# Altium PCB PCB1.PcbDoc (part 2 of 3)
Units mil, origin at the board's own origin, x right, y up, seen from the top; angles counter-clockwise.
Board outline 3550 x 3015 mil, 5 copper layers (Top Layer, GND, Layer 1, Layer 2, Bottom Layer), stack 19.334 mil thick; 291 components, 192 nets, 917 pads, 203 vias.
Unrouted connection lines stored in the file: 51.
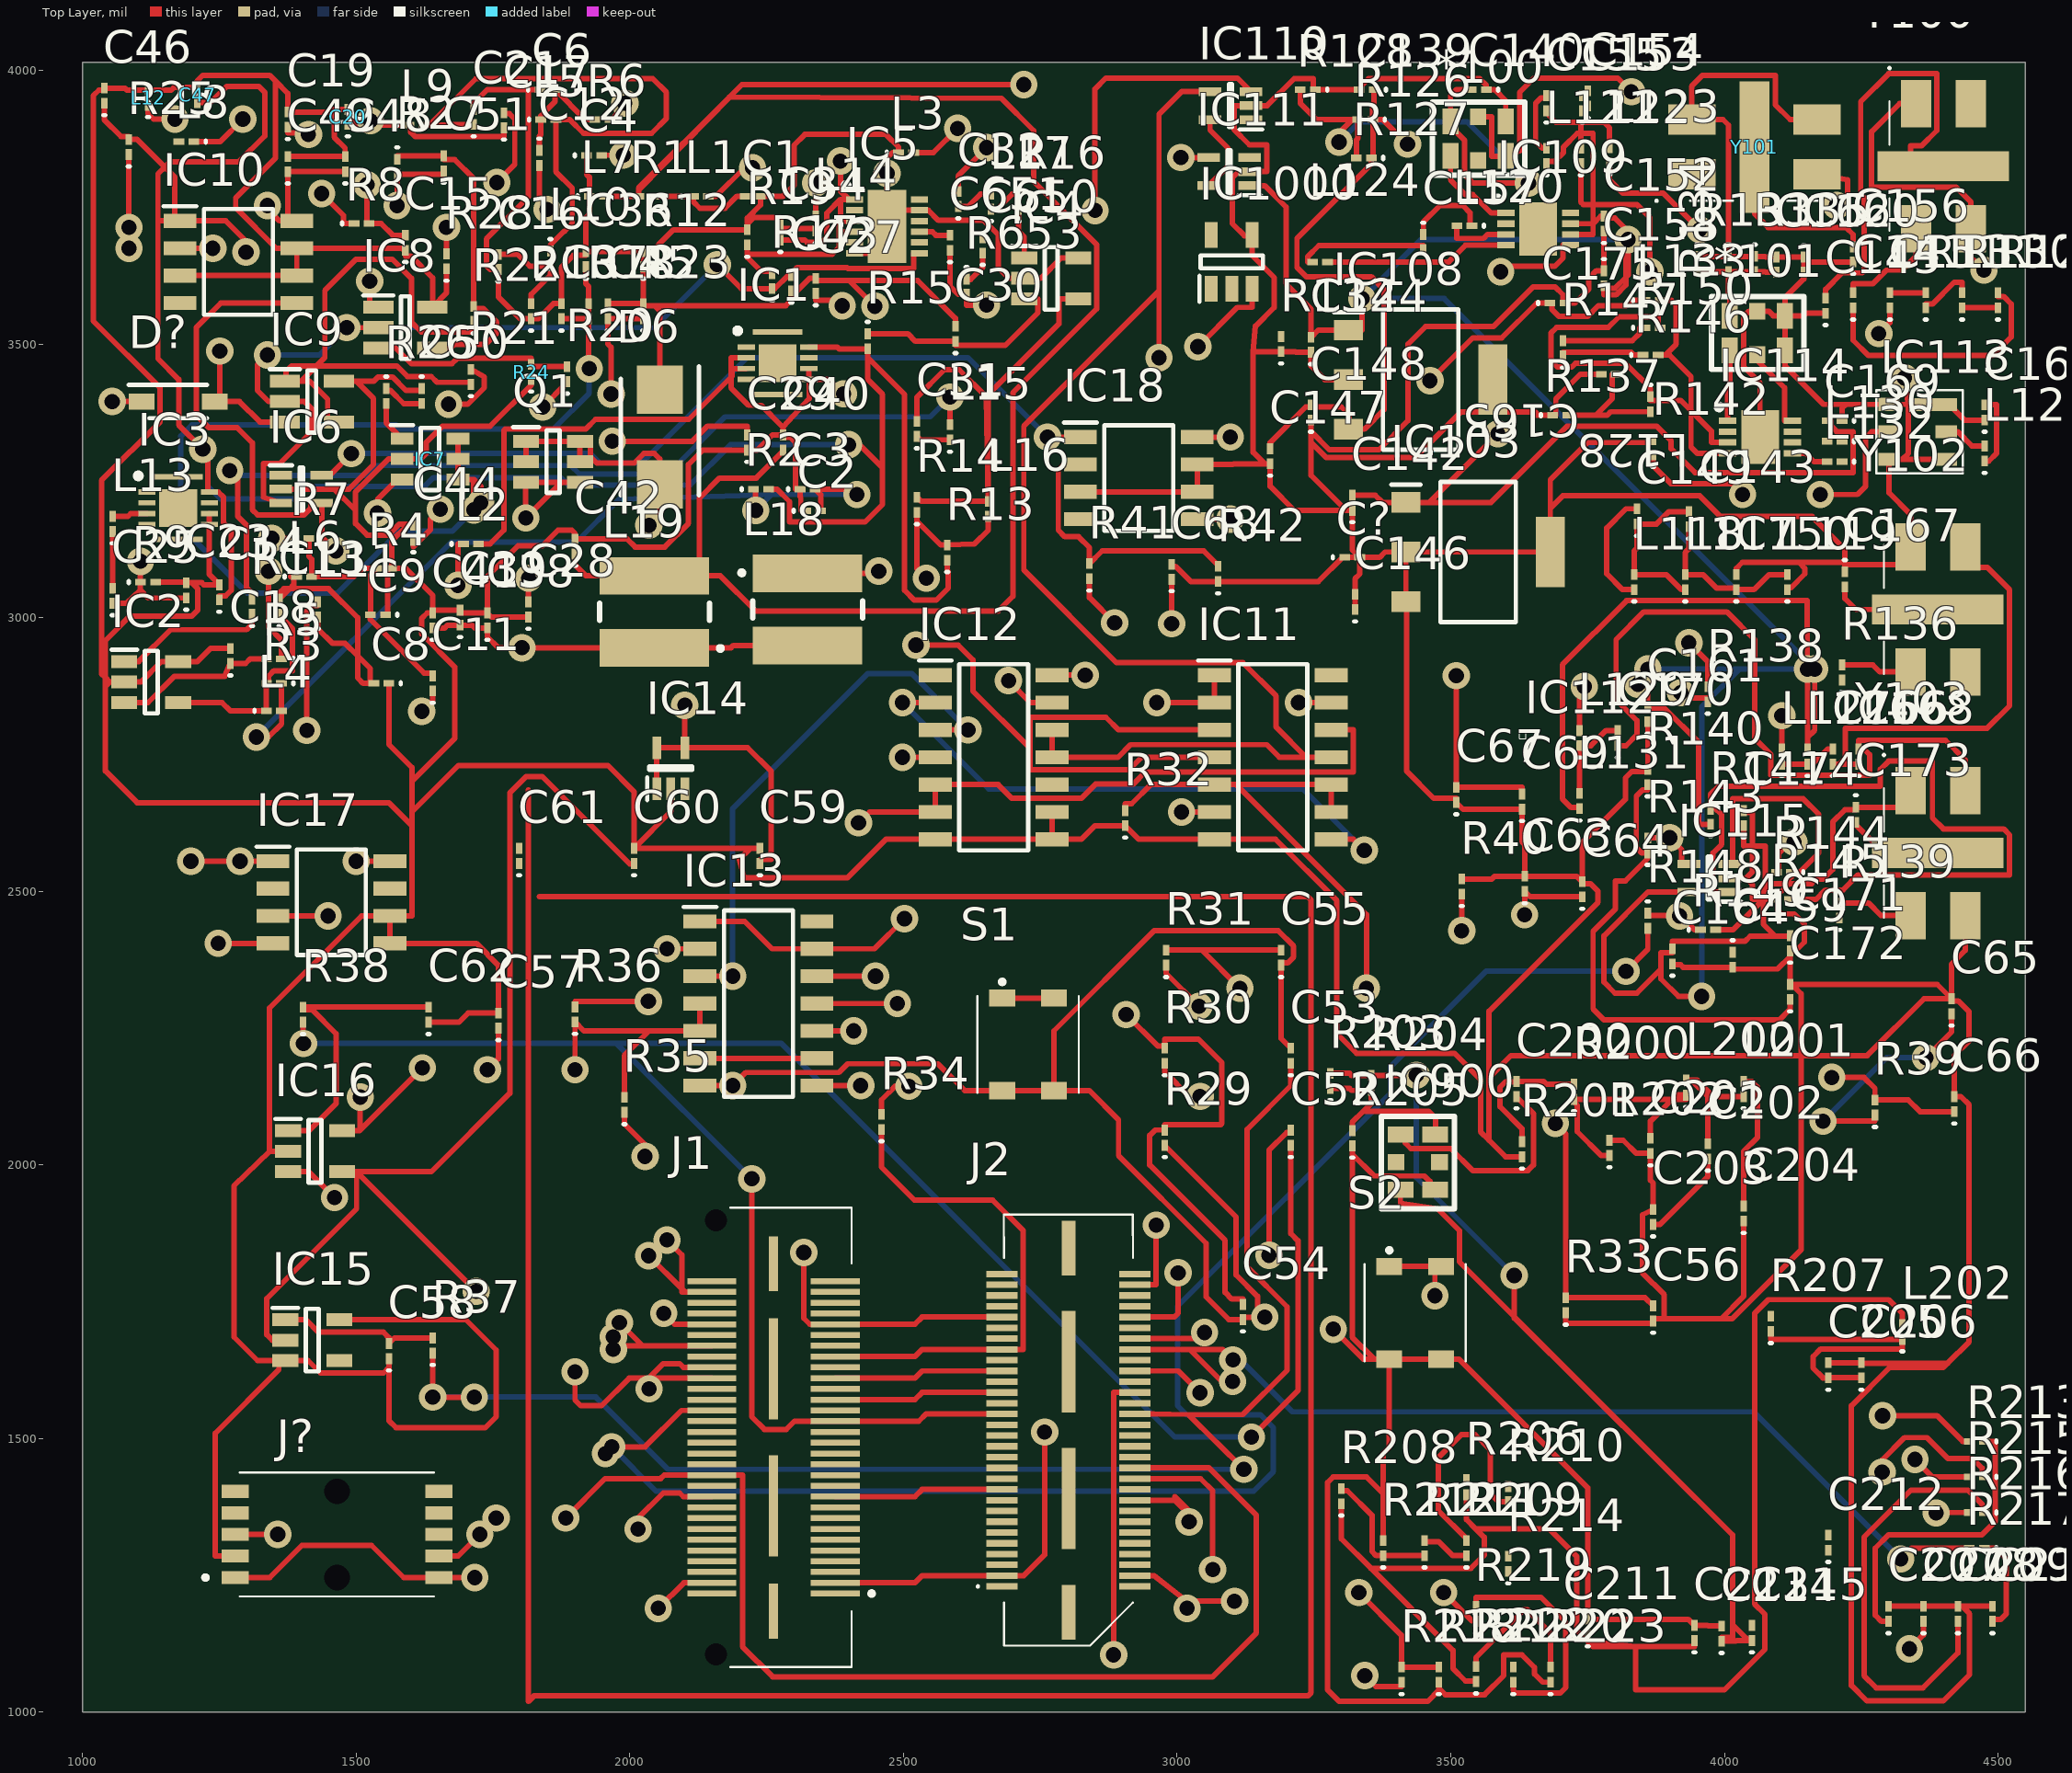
[diagram p0: Top Layer view]

## Via types
v1: diameter 50, hole 28, Top Layer to Bottom Layer, 203 vias

## Nets (pads, with @x,y where several pads share a name; then routed paths per layer and width w, separated by ;. In a path a pad name is that pad's centre, name@x,y a point inside that pad or via, vN(x,y) a via of type N, cw(c..) or ccw(c..) an arc to the next point about the centre after c; other vN are vias at no path point) (continued)
2.5V_2: (continued)
  Top Layer w10: R9.2@1133.78,3065 1186.62,3065 1186.62,3063.78 C23.2@1190,3063.78 1200,3063.78 ; IC10.3@1178.23,3625 IC10.6@1391.77,3625 IC10.7@1391.77,3675 ; IC3.10@1232.09,3190.16 IC3.9@1232.09,3170.47 1232.09,3078.91 1250,3061 C14.2@1250,3060 1221.78,3060 1218,3063.78 1200,3063.78 ; C18.2@1270,2943.78 1233.98,2943.78 1210,2919.8 IC2.5@1175,2919.8 1144.4,2919.8 1107,2882.4 IC2.2@1076.57,2882.4 1050,2882.4 ; J?.3@1278.78,1285.63 1243,1285.63 1243,1510 1359,1626 IC15.3@1359,1642.6 ; IC6.2@1362.6,3235 1460,3235 ; C49.2@1375,3842.56 C48.2@1480,3842.56 1480,3858 1460,3878 1460,3918.94 1454.21,3924.72 ; IC16.2@1375.79,2025 1342,2025 ; IC9.5@1468.43,3432.4 1500,3432.4 ; IC15.5@1469.21,1717.4 1700.6,1717.4 1756,1662 1756,1540 1736,1520 1573,1520 1560,1533 1560,1630 ; C20.2@1485,3928.78 1485,3928.94 1458.42,3928.94 1454.21,3924.72 ; C9.1@1553.78,3005 1558,3005 1558,3090 R4.2@1565,3090 ; C58.1@1560,1646.22 1560,1630 ; C8.1@1560,2880 1560,2768.38 1602,2726.38 1602,2701 ; C44.2@1605,3168.78 C44.2@1605,3169 ; C50.1@1620,3418.78 1620,3415 1591.29,3415 1566.29,3440 1540.26,3440 1532.66,3432.4 1500,3432.4 ; C62.1@1632.76,2260.87 1688,2260.87 1704.69,2277.56 C57.2@1760,2277.56 1760,2365 1720,2405 IC17.5@1561.77,2405 IC17.6@1561.77,2455 ; R28.1@1665,3637.44 1665,3593.19 IC8.5@1640,3568.19 ; C21.2@1715,3928.78 1715,3940 1740,3965 1815,3965 ; C28.1@1815,3001.22 1747.56,3001.22 C38.2@1740,3008.78 ; R24.1@1820,3435 1820,3425 1745,3350 1658,3350 1628,3320 1628,3300 1618,3290 IC7.2@1583.82,3290 1559,3290 1499,3230 1499,3196 ; C6.1@1836.22,3965 1815,3965 ; R36.2@1900,2288.78 1900,2299 v1(2034,2299) ; C42.2@1900,3143.78 C42.2@1900,3144 ; C4.1@1921.22,3845 1921.22,3810 1926.22,3805 L7.1@1926.22,3770 1926.22,3737.22 1920,3731 C36.2@1920,3668.78 ; C45.2@1960,3573.78 R23.2@2025,3573.78 ; D6.1@2055,3416.61 2055,3560 2045,3570 ; IC14.2@2075,2687.6 2075,2645.67 C60.2@2007.76,2578.43 ; IC13.7@2128.23,2145 v1(2188,2145) 2212,2169 2382,2169 2398,2185 2563,2185 2612.29,2135.71 S1.3@2680.51,2135.71 S1.4@2775,2135.71 ; IC1.2@2212.91,3474.84 2185,3474.84 2185,3420 2217,3388 2240,3388 2280,3348 ; C59.2@2237.76,2578.43 2220,2578.43 ; C2.1@2321.22,3195 2312.5,3195 2312.5,3220 2311.22,3221.28 C3.1@2311.22,3235 2303,3235 2303,3320 2293,3330 2280,3330 C40.2@2280,3333.78 ; IC1.10@2327.09,3455.16 IC1.9@2327.09,3435.47 IC1.9@2328,3435.47 ; L14.1@2340,3706.22 2340,3711 2275,3711 C34.2@2275,3717.56 2275,3731 2226,3731 2215,3720 ; v1(2390.47,3409) 2364,3435.47 IC1.9@2328,3435.47 ; IC5.6@2410.94,3665.79 2470,3665.79 IC5.13@2470,3715 IC5.13@2470,3744.53 ; v1(2448,3569) 2401,3616 ; L3.1@2491.22,3850 L3.1@2491,3850 ; C30.2@2595,3532.56 2595,3547 2526,3616 2401,3616 ; IC12.9@2771.77,2645 IC12.8@2771.77,2595 ; IC4.5@2819.21,3657.4 2788.4,3657.4 2751,3620 IC4.2@2720.79,3620 2693,3620 2673,3640 2673,3700 2647,3726 2564,3726 2545.47,3744.53 IC5.11@2529.06,3744.53 IC5.13@2470,3744.53 ; IC18.3@2823.23,3230 IC18.6@3036.77,3230 IC18.7@3036.77,3280 3102,3280 3103.22,3281.22 3160,3281.22 ; R29.1@2977.76,2035.87 2977.76,2035 3107.76,1905 3107.76,1799.24 3147,1760 3147,1735 v1(3160,1722) 3120,1722 C54.1@3120,1717.44 3094.56,1717.44 3053,1759 3053,1857 2893,2017 2893,2082.71 2840,2135.71 S1.4@2775,2135.71 ; C68.2@2990,3097.56 2990,3094 2997,3094 3025,3066 R42.1@3075,3066 ; R42.1@3075,3066.22 R42.1@3075,3066 ; IC1000.4@3137.4,3699.21 IC1000.4@3137.4,3697.85 ; v1(3168,1835) 3168,2027 3200,2059 3207.76,2059 C52.2@3207.76,2063.43 ; C53.2@3207.76,2213.43 3190,2231.18 C55.1@3190,2365 3190,2369 3202,2369 3213,2380 3213,2400 3185,2428 2958,2428 2775,2245 S1.4@2775,2135.71 ; C148.1@3245,3361.22 3245,3340 ; v1(3285.35,1700) 3340,1645.35 3360,1645.35 ; IC108.2@3313.11,3435 3270,3435 3245,3460 C144.1@3245,3485 3217.22,3485 3216,3486.22 R132.1@3190,3486.22 3190,3486 3139,3486 ; R205.1@3320,2035 3320,2020 ; C142.1@3320,3196.22 C142.1@3320,3196 ; C146.1@3325,3015 C146.2@3325,3042.56 3325,3071 3333.78,3079.78 C?.2@3333.78,3110 ; R212.2@3376.25,1313.78 3376.25,1400 ; IC900.3@3471.28,1954.56 3462,1954.56 3462,1970 3452,1980 3360,1980 3320,2020 ; R221.1@3478,1055 3478,1044.28 ; R40.2@3520,2522.56 3575,2522.56 3580,2527.56 C63.2@3635,2527.56 ; IC108.4@3576.89,3435 3576.89,3376.02 3647.98,3376.02 ; *100.3@3600.44,3906.73 3600.44,3944.56 3580,3965 C140.1@3565,3965 3565,3973 3553,3985 3350,3985 3336,3971 3336,3965 C139.2@3332.44,3965 R128.1@3252.56,3965 3249,3965 3249,3985 3214,3985 3164.59,3935.59 IC110.2@3135,3935.59 3104,3935.59 3104,3892 3132,3864 3164,3864 3164,3815 IC111.2@3132.4,3815 3112,3815 3101,3804 3101,3720 3123.15,3697.85 IC1000.4@3137.4,3697.85 ; R201.1@3630,2015 3600,2015 3570,2045 ; R223.1@3682,1055 3668,1055 3653,1070 3653,1082 3630.31,1104.69 3597.01,1104.69 3597.01,1067.31 3561.98,1032.28 3490,1032.28 3478,1044.28 ; R33.1@3710,1730 3710,1711 3870,1711 C56.1@3870,1715 3870,1719 3890,1719 ; C165.1@3775,3445 3737,3445 3692,3400 3692,3370 R137.1@3686.22,3370 3660,3370 ; C158.1@3780,3633.78 C158.1@3780,3634 ; C152.1@3780,3706.22 C158.1@3780,3634 ; R202.2@3790,2045 3815,2045 3838.78,2021.22 C201.1@3865,2021.22 3865,1972 3870,1967 C203.2@3870,1918.78 3850,1909 3850,1803 3890,1763 3890,1719 ; C161.1@3860,2810 R140.2@3860,2722.56 3860,2719 3831,2719 3819,2707 3819,2668 3740,2589 C64.2@3740,2517.56 ; R142.2@3870,3325 3870,3320 3750,3320 3681.89,3251.89 3681.89,3200 ; C164.1@3905,2367.44 3905,2365.82 3920,2365.82 3924.6,2361.22 C159.2@4015,2361.22 4015,2358 4097,2358 4120,2381 ; R133.1@3950,3660 R134.1@4007.5,3660 ; C214.2@3995,1157.56 3970.22,1157.56 3969,1158.78 C213.2@3945,1158.78 3933.78,1170 C211.2@3750,1170 3750,1410.35 3515,1645.35 S2.4@3482.24,1645.35 S2.3@3387.76,1645.35 ; IC115.2@4010,2524.41 4040,2524.41 ; C150.2@4021.67,3078.78 4021.67,3090 4032.67,3101 4136,3101 ; C204.1@4035,1897.44 4035,1760 3994,1719 ; C174.2@4035,2647.56 4035,2644 4051,2644 4051,2535.41 4040,2524.41 ; IC114.9@4065,3330 4065,3429 4035,3459 4035,3550 4045,3560 *101.2@4060,3560 4081,3560 4089.27,3551.73 *101.3@4110.44,3551.73 ; L119.1@4115,3051.22 4115,3055 4122,3055 4147,3080 4147,3090 4136,3101 ; Y101.4@4169.17,3910.04 4120,3910.04 4093,3937.04 4093,3991 3960,3991 3940,3971 3940,3910.04 Y101.6@3940.83,3910.04 3997.46,3910.04 4007.5,3900 R134.1@4007.5,3660 ; C145.1@4185,3556.22 4149.49,3556.22 4145,3551.73 *101.3@4110.44,3551.73 ; C205.2@4190,1638.78 C206.2@4250,1638.78 4250,1638 4408,1638 ; C169.1@4215,3360 4215,3382.67 4222,3389.67 ; C167.1@4220,3083.78 4220,3097 ; C156.1@4235,3650 4153.78,3650 C160.1@4149.39,3654.39 ; C173.1@4240,2653.78 C173.1@4240,2653 ; C207.2@4300,1193.78 C208.2@4363.33,1193.78 C209.2@4426.67,1193.78 4434.22,1193.78 ; v1(4329,3438) 4336,3389.67 ; Y103.1@4339.96,2684.17 4339.96,2653 C173.1@4240,2653 ; Y100.1@4350,3939.17 4320,3939.17 4269,3888.17 4269,3787 4423,3787 4450,3760 Y100.4@4450,3710.83 4450,3659 v1(4474,3635) ; IC113.3@4405,3289.66 4325.66,3289.66 ; Y103.4@4439.96,2455.83 4439.96,2391.96 4415,2367 C65.2@4415,2303.78 ; C163.1@4475,3361.22 4475,3361 4438.64,3361 4410,3389.64 IC113.1@4385.31,3389.64 4336,3389.64 ; C210.2@4490,1193.78 4434.22,1193.78 ; 1042,2874.4 1042,2890.4 ; 1042,2874.4 1042,2720 1100,2662 1560,2662 1602,2620 ; 1042,2874.4 1050,2882.4 ; 1042,2890.4 1042,2958.38 1086.62,3003 1200,3003 1211,3014 1211,3052.78 1200,3063.78 ; 1042,2890.4 1050,2882.4 ; 1042,2890.4 1035,2897.4 1035,3251 1142,3358 1142,3420 1020,3542 1020,3954 1030,3964 1040,3964 C46.2@1040,3967.56 1078,3967.56 1081.78,3963.78 L12.2@1120,3963.78 1162,3963.78 1167,3968.78 C47.2@1210,3968.78 1210,3981 1220,3991 1342,3991 1353,3980 ; 1342,2025 1277,1962 1277,1685.6 1320,1642.6 IC15.3@1359,1642.6 ; 1342,2025 1342,2287 1510,2455 IC17.6@1561.77,2455 ; 1353,3980 1375,3958 C19.2@1375,3923.78 1453.27,3923.78 1454.21,3924.72 ; 1353,3980 1353,3840 1280,3767 1280,3749 1354,3675 IC10.7@1391.77,3675 ; IC15.3@1359,1642.6 IC15.3@1370.79,1642.6 1412.4,1642.6 1435,1620 1550,1620 1560,1630 ; IC10.7@1391.77,3675 1587.22,3675 1587.22,3671.22 C15.1@1590,3671.22 1590,3660.83 1600,3660.83 1640,3620.83 IC8.5@1640,3568.19 ; 1460,3235 1487,3235 1532,3280 1532,3400.4 1500,3432.4 ; 1460,3235 1499,3196 ; 1499,3196 1499,3172 1520,3151 1559,3151 1579,3171 1605,3171 C44.2@1605,3169 ; IC17.6@1561.77,2455 1602,2455 1602,2620 ; R4.2@1565,3090 1591,3090 1640,3041 C41.2@1640,3013.78 ; R4.2@1565,3090 1565,3140 1594,3169 C44.2@1605,3169 ; 1602,2620 1602,2645 ; 1602,2645 1602,2701 ; 1602,2645 1687,2730 1960,2730 2007.76,2682.24 C60.2@2007.76,2578.43 ; 1602,2701 1680,2779 1680,2910 1620,2970 1620,2998.78 1630,3008.78 C41.2@1640,3008.78 C41.2@1640,3013.78 ; C41.2@1640,3013.78 C39.2@1690,3013.78 1690,3008.78 C38.2@1740,3008.78 ; IC8.5@1640,3568.19 1640,3567.4 IC8.5@1639.21,3567.4 IC8.5@1640,3568.19 ; C38.2@1740,3008.78 1740,3075.66 1795.81,3131.48 1840.42,3131.48 1868.94,3160 1894.16,3160 1900,3154.16 C42.2@1900,3144 ; 1815,3965 1815,3769 1737.94,3691.94 1737.94,3643.06 1744.78,3636.22 C16.1@1760,3636.22 1760,3586 1800,3546 1820,3546 R10.1@1820,3546.22 1833,3546.22 1860.56,3573.78 C37.2@1875,3573.78 1875,3640 1897,3662 1920,3662 C36.2@1920,3668.78 ; C42.2@1900,3144 1995,3144 2010,3129 2064,3129 2107.32,3172.32 2107.32,3280 2133.32,3306 2215,3306 C29.1@2215,3306.22 2233,3306.22 2260.56,3333.78 C40.2@2280,3333.78 ; C36.2@1920,3668.78 R12.2@2025,3668.78 2025,3653.78 ; C60.2@2007.76,2578.43 2220,2578.43 ; R23.2@2025,3573.78 2025,3607 R12.1@2025,3641.22 2025,3653.78 ; R23.2@2025,3573.78 2025,3570 2045,3570 ; 2025,3653.78 2080,3708.78 R19.2@2215,3708.78 2215,3720 ; 2045,3570 2285,3570 2295,3580 C43.1@2295,3597.44 2306,3597.44 2328.56,3620 C27.2@2340,3620 2340,3616 2401,3616 ; 2215,3720 2215,3730 2238.78,3753.78 C1.1@2238.78,3770 2280,3770 2300,3790 2300,3863 2320,3883 2468,3883 2491,3860 L3.1@2491,3850 ; 2220,2578.43 2200,2558.43 2209.39,2525 2398,2525 2468,2595 IC12.7@2558.23,2595 IC12.8@2771.77,2595 ; C40.2@2280,3333.78 2280,3348 ; 2280,3348 2328,3400 IC1.9@2328,3435.47 ; IC5.13@2470,3744.53 v1(2470,3811.93) 2470,3840 2480,3850 L3.1@2491,3850 ; IC12.8@2771.77,2595 2825,2595 2850,2620 R32.1@2905,2620 2930,2595 IC11.7@3068.23,2595 3180,2595 3292,2483 3292,2240 3328.06,2203.94 3507.06,2203.94 3554.3,2156.7 3554.3,2060.7 3570,2045 ; R42.1@3075,3066 3258,3066 3302,3110 C?.1@3306.22,3110 C?.2@3333.78,3110 ; IC1000.4@3137.4,3697.85 3137.4,3661.45 3177.4,3621.45 3177.4,3566.88 3143.26,3532.74 3139,3486 ; 3139,3486 3139,3302.22 3160,3281.22 ; 3160,3281.22 C147.1@3170,3281.22 3170,3240 3214,3196 3309,3196 ; 3245,3320 3245,3340 ; 3245,3320 3245,3260 3309,3196 ; 3245,3320 3272,3293 3436,3293 3519,3376 3648,3376 ; 3245,3340 3278,3307 3369,3307 3422,3360 3422,3500 3453.88,3531.88 3578,3531.88 3650.12,3604 3691,3604 3705,3590 3705,3575 C175.2@3708.78,3575 3727,3575 3752,3600 3752,3620 3766,3634 C158.1@3780,3634 ; 3309,3196 C142.1@3320,3196 ; 3320,2020 3320,1685.35 3360,1645.35 ; C142.1@3320,3196 3320,3123.78 C?.2@3333.78,3110 ; C?.2@3333.78,3110 3370,3110 3380,3120 IC103.2@3418.11,3120 ; 3360,1645.35 S2.3@3387.76,1645.35 ; 3376.25,1400 3376.25,1473 3387.76,1484.51 S2.3@3387.76,1645.35 ; 3376.25,1400 3346.25,1430 3285,1430 3275,1420 3275,1041 3296,1020 3458,1020 3478,1040 3478,1044.28 ; IC103.2@3418.11,3120 IC103.3@3418.11,3029.45 3419,3029.45 3419,2720 3469,2670 3510,2670 C67.1@3510,2662.44 3522.44,2650 C69.1@3630,2650 3630,2591 3635,2586 C63.2@3635,2527.56 ; IC103.2@3418.11,3120 IC103.4@3681.89,3120 3681.89,3200 ; 3570,2045 3570,2160 ; 3570,2160 3570,2281 3769,2480 3769,2500 3755,2514 3740,2514 C64.2@3740,2517.56 ; 3570,2160 3610,2200 4140,2200 ; C63.2@3635,2527.56 3730,2527.56 C64.2@3740,2517.56 ; 3648,3376 3654,3370 3660,3370 ; 3648,3376 3654,3376 3660,3370 ; 3681.89,3200 3704.63,3222.74 3954.96,3222.74 3992.7,3185 4160,3185 4220,3125 4220,3101 ; 3890,1719 3994,1719 ; 3994,1719 4014,1719 4140,1845 4140,2200 ; R134.1@4007.5,3660 R135.1@4055,3660 4074,3660 4075.22,3658.78 C162.1@4095,3658.78 C160.1@4145,3658.78 C160.1@4149.39,3654.39 ; 4040,2524.41 4051,2513.41 4051,2485 R145.2@4091.22,2485 R145.2@4098,2485 ; R145.2@4098,2485 4098,2500 4104,2500 4118,2514 4159.58,2514 4168,2522.42 4180.42,2522.42 4198,2540 4198,2627 4220,2649 4240,2649 C173.1@4240,2653 ; R145.2@4098,2485 4098,2465 4104.14,2458.86 4127.14,2458.86 4146,2440 4146,2407.22 4130,2391.22 C171.1@4120,2391.22 4120,2381 ; *101.3@4110.44,3551.73 4110.44,3584.44 4145,3619 C160.2@4145,3631.22 4145,3650 C160.1@4149.39,3654.39 ; *101.3@4110.44,3551.73 *101.6@4110.44,3488.72 4110.44,3460 4180.77,3389.67 4222,3389.67 ; C172.2@4120,2330 4388.78,2330 C65.2@4415,2303.78 ; C172.2@4120,2330 4120,2326 4127,2326 4140,2313 4140,2200 ; C172.2@4120,2330 4120,2381 ; 4136,3101 4220,3101 ; 4140,2200 4261,2200 4364.78,2303.78 C65.2@4415,2303.78 ; 4220,3097 4339.96,3097 Y102.1@4339.96,3129.17 4339.96,3189 4300.67,3228.29 IC113.4@4300.67,3289.66 4325.66,3289.66 ; 4220,3097 4220,3101 ; 4222,3389.67 IC113.6@4300.67,3389.67 ; IC113.6@4300.67,3389.67 4336,3389.67 ; IC113.6@4300.67,3389.67 4336,3389.64 ; 4325.66,3289.66 4336,3300 4336,3389.64 ; 4408,1638 4447,1677 4447,2110 4432,2125 C66.2@4420,2125 4420,2200 4447,2227 4447,2280 4427,2300 4415,2300 C65.2@4415,2303.78 ; 4408,1638 4400,1630 4302,1630 4232,1560 4232,1049 4260,1021 4400,1021 4448,1069 4448,1180 4434.22,1193.78
  Layer 1 w10: v1(2034,2299) v1(2188,2145) ; v1(3168,1835) 3168,1730 v1(3160,1722) 3182,1700 v1(3285.35,1700) ; v1(4329,3438) 4340,3449 4340,3501 v1(4474,3635)
  Layer 2 w10: v1(2188,2145) 2344,2301 2344,3215 2400,3271 2420,3271 2448,3299 2448,3466.53 ; v1(2390.47,3409) 2448,3466.53 ; v1(2448,3569) 2448,3466.53
2.5V_3: C214.1 C215.1 IC900.6 R203.2 R204.2 | length 2466.9
  Top Layer w10: R203.2@3280,2167.56 3315,2167.56 3318.78,2163.78 R204.2@3355,2163.78 v1(3437,2163.78) ; IC900.6@3408.27,1954.56 3408,1954.56 3408,1930 3476,1920 3516,1880 3516,1823 3616,1723 ; v1(3616,1798) 3616,1723 ; 3616,1723 3616,1720 4015,1324 ; 3616,1723 4015,1324 ; 4015,1160 4015,1137 3995,1137 C214.1@3995,1130 4021,1130 4022.22,1131.22 C215.1@4050,1131.22 4039,1136 4015,1160 ; 4015,1160 4015,1324
  Bottom Layer w10: v1(3437,2163.78) 3437,1977 v1(3616,1798)
2.83V: C14.1 C46.1 C47.1 IC1.6 IC1.12 IC1.13 IC1.16 IC3.6 IC3.12 IC3.13 IC3.16 IC10.1 R2.2 R5.1 R13.1 R15.2 R25.2 | length 4887.7
  Top Layer w10: C46.1@1040,3940 1040,3909.73 1070.73,3879 1085,3879 R25.2@1085,3873.78 1100,3873.78 1150.39,3823.39 ; C47.1@1210,3941.22 1210,3941 1234,3941 1264,3971 1322,3971 1333,3960 1333,3880 1286,3833 1160,3833 1150.39,3823.39 ; C14.1@1250,3032.44 1250,3040 1262,3040 1272,3050 1272,3159 1258,3173 1258,3220 1248.47,3229.53 IC3.12@1232.09,3229.53 1229,3229.53 1229,3299 v1(1220,3308) 1176.04,3351.96 1176.04,3435.3 1138,3473.34 1138,3725 ; v1(1298.98,3668) 1298.98,3688 1261.98,3725 IC10.1@1178.23,3725 IC10.1@1169,3725 ; v1(1340,3085) 1340,2982.78 1363.78,2959 R5.1@1363.78,2925 ; R2.2@2253.78,3235 2269,3235 2292,3212 2292,3175 2430,3175 2462,3207 2462,3274 ; IC1.12@2327.09,3494.53 2379,3494.53 2382.31,3491.22 R15.2@2435,3491.22 2435,3475 ; v1(2400,3316) 2420,3316 2462,3274 ; R13.1@2580,3105 2580,3086 2582,3084 2582,3054 2560,3032 2520,3032 2502,3050 2502,3408 2435,3475 ; 1138,3725 IC10.1@1169,3725 ; 1138,3725 1138,3811 1150.39,3823.39 ; 1150.39,3823.39 1169,3804.78 IC10.1@1169,3725 ; 2435,3475 2435,3435 2462,3408 2462,3274
  Layer 2 w10: v1(1220,3308) 1220,3205 v1(1340,3085)
  Bottom Layer w10: v1(1220,3308) 1229,3299 1229,3240 1252.07,3216.93 1388.86,3216.93 1411.93,3240 1625.5,3240 1641.5,3256 1874.32,3256 1888,3242.32 2110.32,3242.32 2184,3316 v1(2400,3316)
3.0V: C67.2 C69.2 IC6.5 IC18.1 R41.1 | length 3736.9
  Top Layer w10: IC6.5@1437.4,3260.59 1452,3260.59 v1(1491.41,3300) ; v1(2763.19,3330) 2764,3330 IC18.1@2823.23,3330 ; R41.1@2840,3071.22 2840,3036.66 v1(2886,2990.66) ; v1(3510,2894) C67.2@3510,2690 3630,2690 C69.2@3630,2677.56
  Layer 1 w10: v1(2763.19,3330) 2826,3267.19 2826,2994 2880,2940 2936.66,2940 ; v1(2886,2990.66) 2936.66,2940 ; 2936.66,2940 3464,2940 v1(3510,2894) 2982.66,2894 2936.66,2940
  Bottom Layer w10: v1(1491.41,3300) 1928,3300 1945.68,3282.32 2021.32,3282.32 2214,3475 2618.19,3475 v1(2763.19,3330)